# Altium PCB praline.PcbDoc (part 4 of 8)
Units mm, origin at the board's own origin, x right, y up, seen from the top; angles counter-clockwise.
Board outline 152.4 x 101.6 mm, 6 copper layers (In2.Cu, F.Cu, B.Cu, In1.Cu, In3.Cu, In4.Cu); 581 components, 490 nets, 2812 pads, 953 vias.
Unrouted connection lines stored in the file: 404.
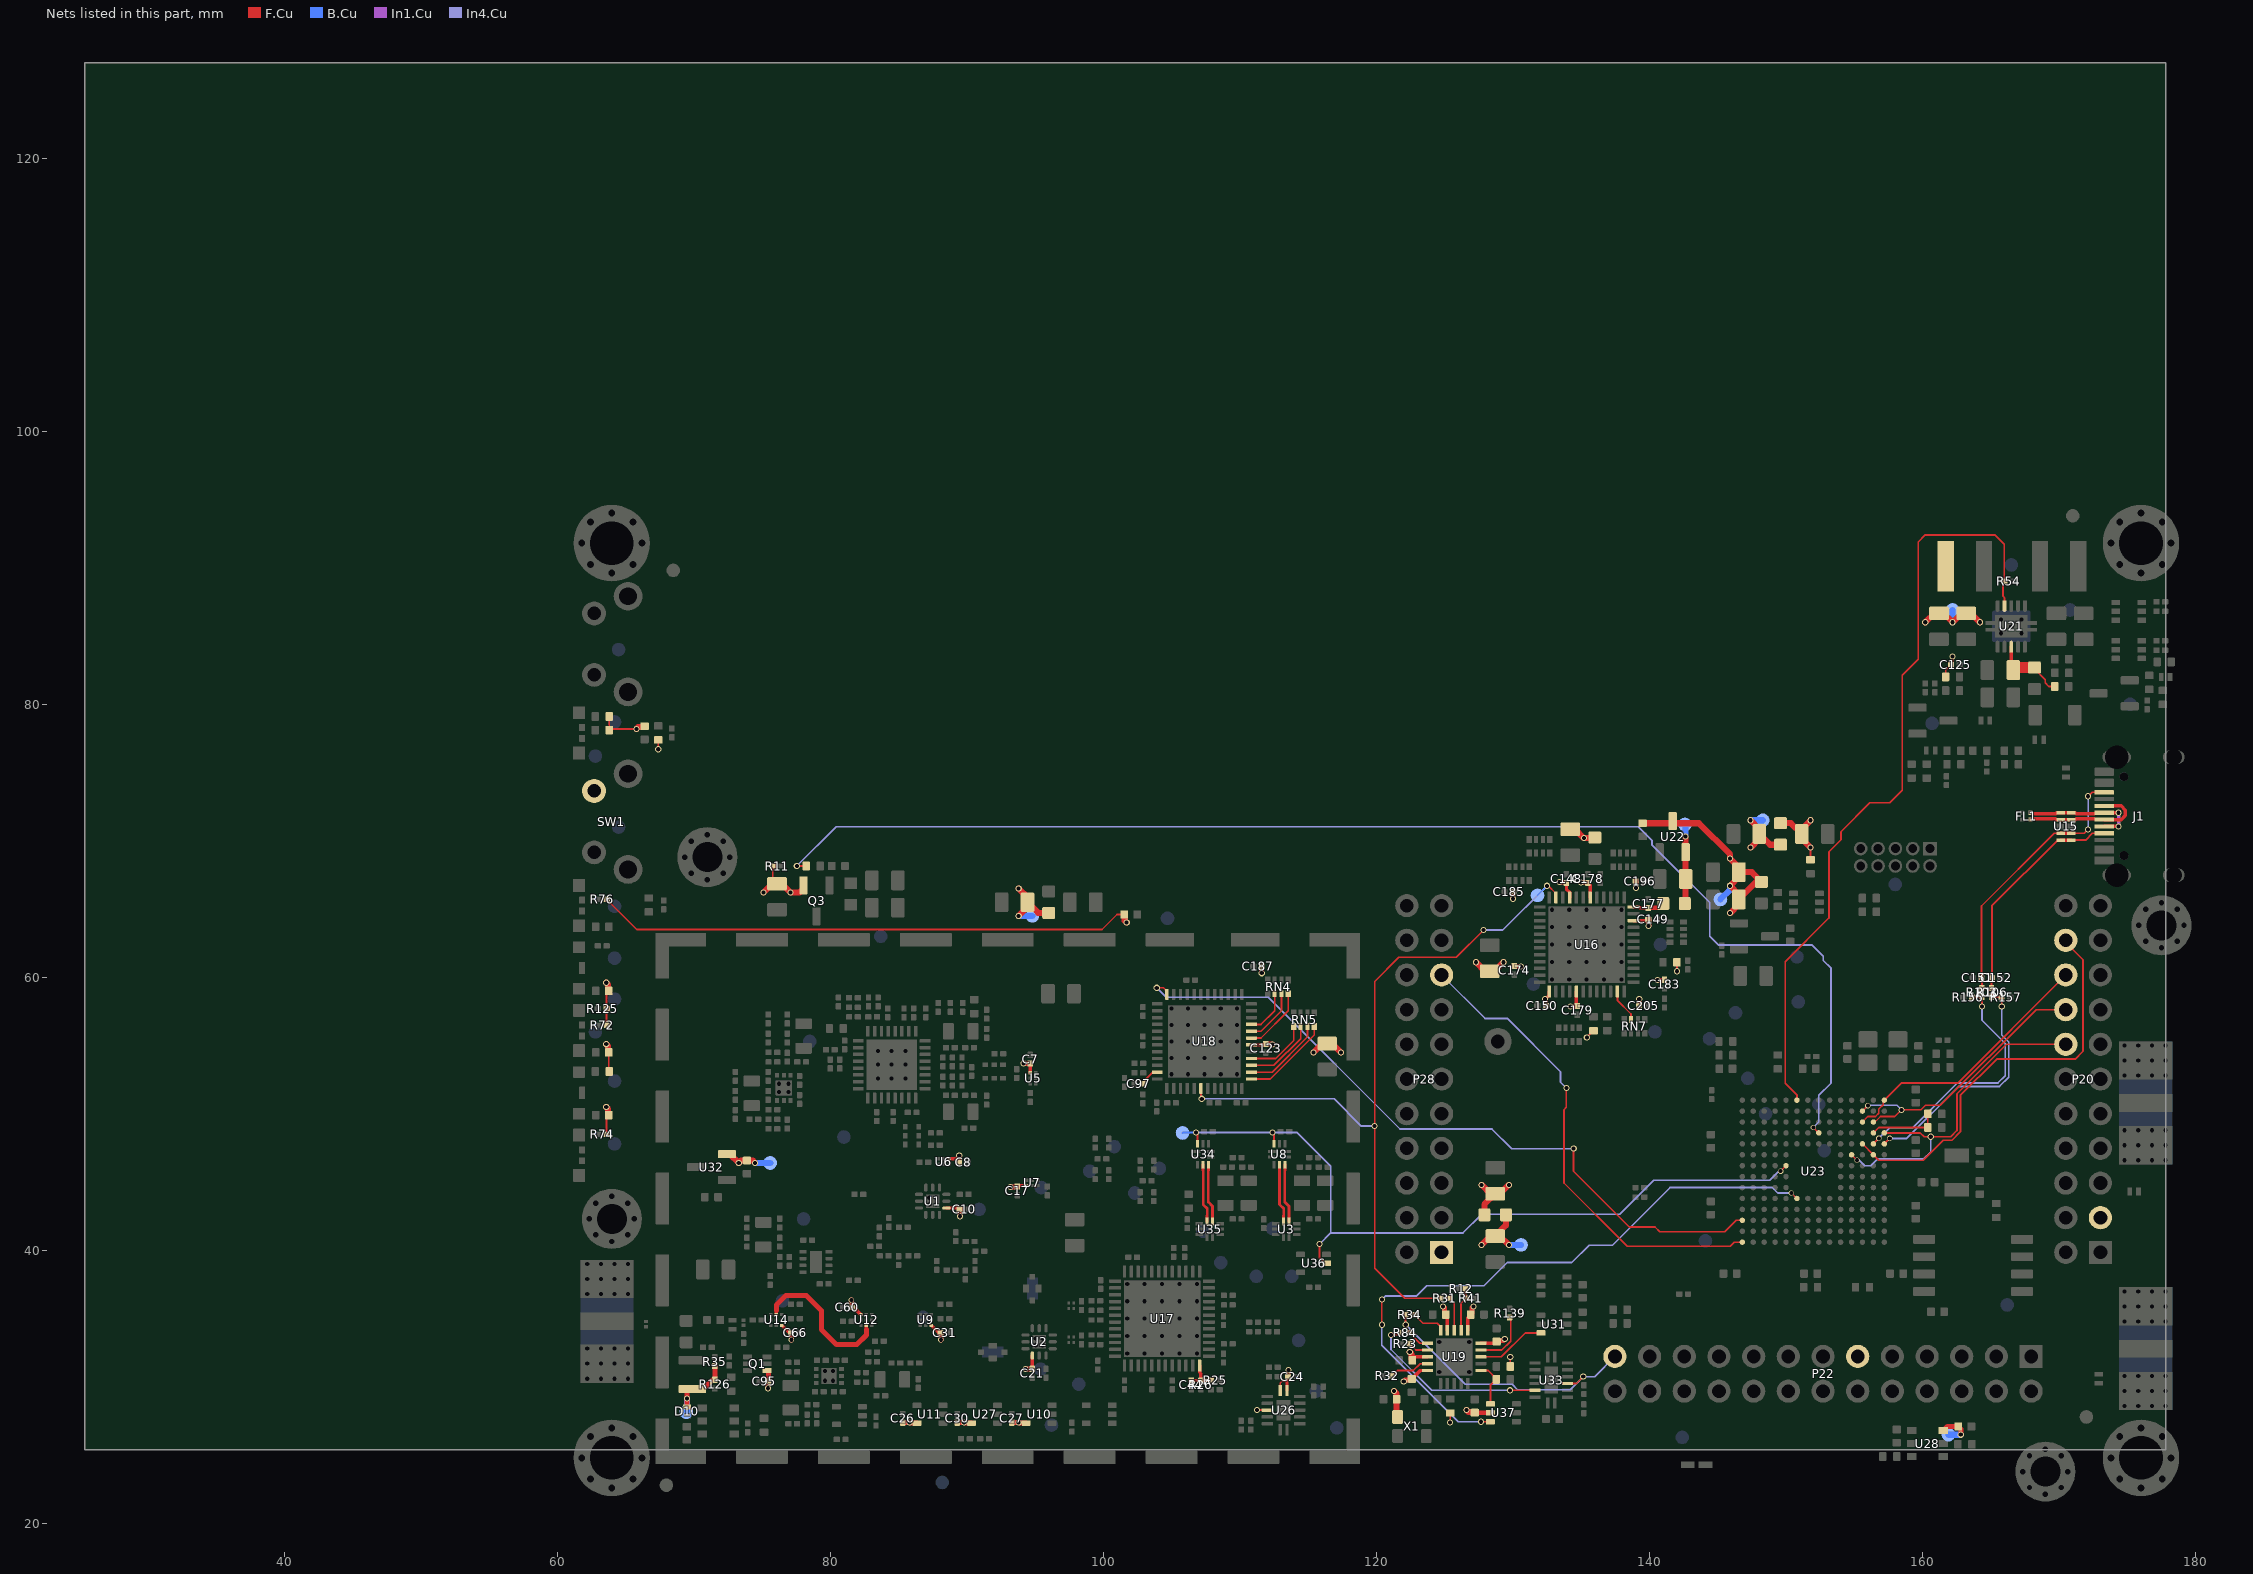
[diagram p7: the nets of this part, all layers, seen from the top]

## Part data (continued)
FB1 FB2 FB3 FB4 FB5 FB6 FB7 FB8: library part L_0603_1608Metric, "Inductor SMD 0603 (1608 Metric), square (rectangular) end terminal, IPC_7351 nominal, (Body size source: http://www.tortai-tech.com/upload/download/2011102023233369053.pdf), generated with kicad-footprint-generator", Manufacturer=TAI-TECH, Part Number=HCB1608KF-102T10, Datasheet=https://datasheet.lcsc.com/lcsc/2009171410_TAI-TECH-HCB1608KF-102T10_C304312.pdf, Description="1kΩ@100MHz 200mΩ ±25% 0603 Ferrite Bead", Substitution="Murata BLM18KG102SN1*", ki_fp_filters="Inductor_* L_* *Ferrite*"
FID1 FID2 FID3 FID4: library part Fiducial_1mm_Mask2mm, "Circular Fiducial, 1mm bare copper, 2mm soldermask opening (Level A)"
FL1: library part L_CommonModeChoke_Murata_DLM0NS, "Chip Common Mode Choke Coil, https://www.murata.com/en-global/products/productdata/8799424610334/EFLD0009.pdf", Manufacturer=Murata, Part Number=DLM0NSB280HY2D, Datasheet=https://www.murata.com/en-global/products/productdata/8799424610334/EFLD0009.pdf, Description="CMC 130MA 2LN 28 OHM SMD", ki_fp_filters="L_* L_CommonMode*"
FL2 FL3: library part Filter_Pulse_BPF1608LM09R5000A, "RF filter SMD 0603", Manufacturer="Pulse Electronics", Part Number=BPF1608LM02R2400A, Datasheet=https://productfinder.pulseelectronics.com/api/open/part-attachments/datasheet/BPF1608LM02R2400A, Description="RF FILTER BAND PASS 2.45GHZ 0603", ki_fp_filters=Filter*Mini?Circuits*FV1206*
H1 H2 H3 H4: library part MountingHole_3.2mm_M3_Pad_Via, "Mounting Hole 3.2mm, M3, generated by kicad-footprint-generator mountinghole.py", Datasheet=~, Description="Mounting Hole with connection", ki_fp_filters=MountingHole*Pad*
H5 H6 H7 H8: library part MountingHole_2.2mm_M2_Pad_Via, "Mounting Hole 2.2mm, M2, generated by kicad-footprint-generator mountinghole.py", Datasheet=~, Description="Mounting Hole with connection", ki_fp_filters=MountingHole*Pad*
J1: library part USB_C_Receptacle_HRO_TYPE-C-31-M-12, "USB Type-C receptacle for USB 2.0 and PD, http://www.krhro.com/uploads/soft/180320/1-1P320120243.pdf", Manufacturer=DEALON, Part Number=USB-TYPE-C-019, Datasheet=~, Description="CONN RCPT USB2.0 TYPE-C 16POS", Substitution="Yuandi TYPE-611A-T3", ki_fp_filters=USB*C*Receptacle*
J3: library part Laird_Technologies_BMI-S-230-F_50.8x38.1mm, "Laird Technologies BMI-S-230-F Shielding Cabinet Two Piece SMD 50.8x38.1mm", Manufacturer="TE Connectivity", Part Number=2118732-2, Datasheet=~, Description="BOARD SHIELD 2INX1.5IN FRAME", Note="use with shield 2118731-2"
JP1: library part SolderJumper-2_P1.3mm_Bridged_RoundedPad1.0x1.5mm, "SMD Solder Jumper, 1x1.5mm, rounded Pads, 0.3mm gap, bridged with 1 copper strip", Datasheet=~, Description="Solder Jumper, 2-pole, closed/bridged", ki_fp_filters=SolderJumper*Bridged*
L1: library part L_0201_0603Metric, "Inductor SMD 0201 (0603 Metric), square (rectangular) end terminal, IPC-7351 nominal, (Body size source: https://www.vishay.com/docs/20052/crcw0201e3.pdf), generated with kicad-footprint-generator", Datasheet=~, ki_fp_filters="Choke_* *Coil* Inductor_* L_*"
L2 L4 L5 L21 L22 L23 L24 L26 L27 L29 L33: library part L_TDK_MLZ2012_h1.25mm, "Inductor, TDK, MLZ2012_h1.25mm, 2.0x1.25x1.25mm (https://product.tdk.com/en/system/files/dam/doc/product/inductor/inductor/smd/catalog/inductor_commercial_decoupling_mlz2012_en.pdf)", Manufacturer=TDK, Part Number=MLZ2012N101LT000, Datasheet=~, Description="FIXED IND 100UH 140MA 3.5OHM SMD", Substitution=MLZ2012N101LTD25, ki_fp_filters="Choke_* *Coil* Inductor_* L_*"
L3 L12 L30 L31 L32: library part L_0201_0603Metric, "Inductor SMD 0201 (0603 Metric), square (rectangular) end terminal, IPC-7351 nominal, (Body size source: https://www.vishay.com/docs/20052/crcw0201e3.pdf), generated with kicad-footprint-generator", Manufacturer=Murata, Part Number=LQP03TN56NJ02D, Datasheet=~, Description="FIXED IND 56NH 100MA 3.9 OHM SMD", Substitution=LQP03TN56NH02D, ki_fp_filters="Choke_* *Coil* Inductor_* L_*"
L6: library part L_0201_0603Metric, "Inductor SMD 0201 (0603 Metric), square (rectangular) end terminal, IPC-7351 nominal, (Body size source: https://www.vishay.com/docs/20052/crcw0201e3.pdf), generated with kicad-footprint-generator", Manufacturer=Murata, Part Number=LQP03TN5N6H02D, Datasheet=~, Description="FIXED IND 5.6NH 350MA 400MOHM 0201", ki_fp_filters="Choke_* *Coil* Inductor_* L_*"
L7: library part L_0201_0603Metric, "Inductor SMD 0201 (0603 Metric), square (rectangular) end terminal, IPC_7351 nominal, (Body size source: https://www.vishay.com/docs/20052/crcw0201e3.pdf), generated with kicad-footprint-generator", Datasheet=~, ki_fp_filters="Choke_* *Coil* Inductor_* L_*"
L8 L15: library part L_0201_0603Metric, "Inductor SMD 0201 (0603 Metric), square (rectangular) end terminal, IPC_7351 nominal, (Body size source: https://www.vishay.com/docs/20052/crcw0201e3.pdf), generated with kicad-footprint-generator", Manufacturer=Murata, Part Number=LQP03TN4N7H02D, Tolerance=±3%, Datasheet=~, Description="FIXED IND 4.7NH 350MA 400MOHM 0201", ki_fp_filters="Choke_* *Coil* Inductor_* L_*"
L9: library part L_0201_0603Metric, "Inductor SMD 0201 (0603 Metric), square (rectangular) end terminal, IPC_7351 nominal, (Body size source: https://www.vishay.com/docs/20052/crcw0201e3.pdf), generated with kicad-footprint-generator", Manufacturer=Murata, Part Number=LQP03TN10NJ02D, Datasheet=~, Description="FIXED IND 10NH 250MA 700MOHM SMD", Substitution=LQP03TN10NH02D, ki_fp_filters="Choke_* *Coil* Inductor_* L_*"
L10 L11: library part L_Taiyo-Yuden_NR-40xx, "Inductor, Taiyo Yuden, NR series, Taiyo-Yuden_NR-40xx, 4.0mmx4.0mm", Manufacturer="Taiyo Yuden", Part Number=LSXND4040TKL4R7MDG, Datasheet=~, Description="FIXED IND 4.7UH 1.7A 84 MOHM SMD", Substitution="NRS4018T4R7MDGJ, LLXND4040TKL4R7MDG, NRS4018T4R7MDGJ", ki_fp_filters="Choke_* *Coil* Inductor_* L_*"
L13: library part L_0603_1608Metric, "Inductor SMD 0603 (1608 Metric), square (rectangular) end terminal, IPC_7351 nominal, (Body size source: http://www.tortai-tech.com/upload/download/2011102023233369053.pdf), generated with kicad-footprint-generator", Manufacturer="Taiyo Yuden", Part Number=LSQPB160807T2R2M, Datasheet=~, Description="FIXED IND 2.2UH 500MA 520MOHM SMD", Substitution="BRL1608T2R2M, LLQPB160807T2R2M", ki_fp_filters="Choke_* *Coil* Inductor_* L_*"
L14: library part L_0201_0603Metric, "Inductor SMD 0201 (0603 Metric), square (rectangular) end terminal, IPC_7351 nominal, (Body size source: https://www.vishay.com/docs/20052/crcw0201e3.pdf), generated with kicad-footprint-generator", Manufacturer=Murata, Part Number=LQP03TN5N6H02D, Tolerance=±3%, Datasheet=~, Description="FIXED IND 5.6NH 350MA 400MOHM 0201", ki_fp_filters="Choke_* *Coil* Inductor_* L_*"
L16 L17: library part L_0201_0603Metric, "Inductor SMD 0201 (0603 Metric), square (rectangular) end terminal, IPC_7351 nominal, (Body size source: https://www.vishay.com/docs/20052/crcw0201e3.pdf), generated with kicad-footprint-generator", Manufacturer=Murata, Part Number=LQP03HQ1N8W02D, Tolerance=±0.05, Datasheet=~, Description="FIXED IND 1.8NH 800MA 0201 0.05", ki_fp_filters="Choke_* *Coil* Inductor_* L_*"
L18: library part L_0201_0603Metric, "Inductor SMD 0201 (0603 Metric), square (rectangular) end terminal, IPC_7351 nominal, (Body size source: https://www.vishay.com/docs/20052/crcw0201e3.pdf), generated with kicad-footprint-generator", Manufacturer=Murata, Part Number=LQP03HQ1N6W02D, Tolerance=±0.05, Datasheet=~, Description="FIXED IND 1.6NH 1000MA 0201 0.05", ki_fp_filters="Choke_* *Coil* Inductor_* L_*"
L19: library part L_Taiyo-Yuden_A251818, "Inductor, Taiyo Yuden, Type A251818, 2.5mmx1.8mm (https://ds.yuden.co.jp/TYCOMPAS/ut/download?pn=LSQEA251818T470M&fileType=ED)", Manufacturer="Taiyo Yuden", Part Number=LSQEA251818T470M, Datasheet=~, Description="FIXED IND 47UH 120MA 0.84OHM SMD", Substitution="LSQEA251818T470K, LBR2518T470M, LBR2518T470K", ki_fp_filters="Choke_* *Coil* Inductor_* L_*"
L28: library part L_0201_0603Metric, "Inductor SMD 0201 (0603 Metric), square (rectangular) end terminal, IPC-7351 nominal, (Body size source: https://www.vishay.com/docs/20052/crcw0201e3.pdf), generated with kicad-footprint-generator", Manufacturer=Murata, Part Number=LQP03TN18NJ02D, Datasheet=~, Description="FIXED IND 18NH 200MA 800MOHM SMD", Substitution=LQP03TN56NH02D, ki_fp_filters="Choke_* *Coil* Inductor_* L_*"
L34: library part L_0201_0603Metric, "Inductor SMD 0201 (0603 Metric), square (rectangular) end terminal, IPC-7351 nominal, (Body size source: https://www.vishay.com/docs/20052/crcw0201e3.pdf), generated with kicad-footprint-generator", Manufacturer=Murata, Part Number=LQP03TN33NJ02D, Datasheet=~, Description="FIXED IND 33NH 120MA 2.95OHM SMD", Substitution=LQP03TN56NH02D, ki_fp_filters="Choke_* *Coil* Inductor_* L_*"
P1 P2 P3: library part SMA_MyAntenna_A-SMA-KE-16.5A_EdgeMount, Manufacturer=MyAntenna, Part Number=A-SMA-KE-16.5A, Datasheet=~, Description="CONN SMA RCPT STR 50OHM EDGE MNT", Substitution=M04-0102170R0A
P20 P28: library part PinSocket_2x11_P2.54mm_Vertical_Flipped, "Through hole straight socket strip, 2x11, 2.54mm pitch, double cols (from Kicad 4.0.7), script generated", Manufacturer=Sullins, Part Number=PPPC112LFBN-RC, Datasheet=~, Description="CONN HEADER FMAL 22PS.1\" DL GOLD", ki_fp_filters=Connector*:*_2x??_*
P22: library part PinSocket_2x13_P2.54mm_Vertical_Flipped, "Through hole straight socket strip, 2x13, 2.54mm pitch, double cols (from Kicad 4.0.7), script generated", Manufacturer=Sullins, Part Number=PPPC132LFBN-RC, Datasheet=~, Description="CONN HEADER FMAL 26PS.1\" DL GOLD", ki_fp_filters=Connector*:*_2x??_*
P26: library part PinHeader_2x05_P1.27mm_Vertical, "Through hole straight pin header, 2x05, 1.27mm pitch, double rows", Manufacturer=Sullins, Part Number=GRPB052VWVN-RC, Datasheet=~, Description="CONN HEADER .050\" 10PS DL PCB AU", ki_fp_filters=Connector*:*_2x??_*
Q1: library part SOT-563, "SOT, 6 Pin (https://www.jedec.org/system/files/docs/MO-293B.pdf), generated with kicad-footprint-generator ipc_gullwing_generator.py", Manufacturer="Diodes Inc.", Part Number=DMC2400UV-7, Datasheet=~, Description="Dual NMOS/PMOS transistor, 6 pin package", Substitution=DMC2400UV*, ki_fp_filters="TSOP* SC?70* SC?88* SOT?363*"
Q3 Q4 Q5 Q6: library part SOT-23-3, "SOT, 3 Pin (JEDEC MO-178 inferred 3-pin variant https://www.jedec.org/document_search?search_api_views_fulltext=MO-178), generated with kicad-footprint-generator ipc_gullwing_generator.py", Manufacturer="Yangzhou Yangjie", Part Number=YJL3401A, Datasheet=https://www.21yangjie.com/pdf/mosfet/YJL3401A.pdf, Description="P-CH MOSFET 30V 4.4A SOT-23-3L", Substitution="Alpha & Omega AO3401A"
Q7 Q10: library part SOT-363_SC-70-6, "SOT-363, SC-70-6, SC-88", Manufacturer="Yangzhou Yangjie", Part Number=BC847BS, Datasheet=https://www.21yangjie.com/pdf/xxh/xxhsjg/BC847BS.pdf, Description="SOT-363 NPN+NPN 0.3W 0.1A 50V", ki_fp_filters=SOT?363*
Q9: library part SOT-363_SC-70-6, "SOT-363, SC-70-6, SC-88", Manufacturer="Yangzhou Yangjie", Part Number=BC857BS, Datasheet=https://www.21yangjie.com/pdf/xxh/xxhsjg/BC857BS.pdf, Description="PNP+PNP TRANS 45V 0.2A SOT-363"
R1 R2 R72: library part R_0201_0603Metric, "Resistor SMD 0201 (0603 Metric), square (rectangular) end terminal, IPC_7351 nominal, (Body size source: https://www.vishay.com/docs/20052/crcw0201e3.pdf), generated with kicad-footprint-generator", Manufacturer=Yageo, Part Number=RC0201JR-07470RL, Datasheet=~, Description="RES 470 OHM 5% 1/20W 0201", Substitution="any equivalent", ki_fp_filters=R_*
R3 R11 R61: library part R_0201_0603Metric, "Resistor SMD 0201 (0603 Metric), square (rectangular) end terminal, IPC_7351 nominal, (Body size source: https://www.vishay.com/docs/20052/crcw0201e3.pdf), generated with kicad-footprint-generator", Manufacturer=Yageo, Part Number=RC0201FR-0722K6L, Datasheet=~, Description="RES 22.6K OHM 1% 1/20W 0201", Substitution="any equivalent", ki_fp_filters=R_*
R4: library part R_0201_0603Metric, "Resistor SMD 0201 (0603 Metric), square (rectangular) end terminal, IPC_7351 nominal, (Body size source: https://www.vishay.com/docs/20052/crcw0201e3.pdf), generated with kicad-footprint-generator", Manufacturer=Yageo, Part Number=RC0201FR-0751KL, Tolerance=±1%, Datasheet=~, Description="RES 51K OHM 1% 1/20W 0201", Substitution="any equivalent", ki_fp_filters=R_*
R5 R7 R36 R37 R40 R44 R48 R49 R52 R59 R62 R63 R64 R66 R67 R68 R75 R85 R93 R100 R104 R105 R120: library part R_0402_1005Metric, "Resistor SMD 0402 (1005 Metric), square (rectangular) end terminal, IPC_7351 nominal, (Body size source: IPC-SM-782 page 72, https://www.pcb-3d.com/wordpress/wp-content/uploads/ipc-sm-782a_amendment_1_and_2.pdf), generated with kicad-footprint-generator", Manufacturer=Yageo, Part Number=RC0402JR-0710KL, Datasheet=~, Description="RES 10K OHM 1/16W 5% 0402 SMD", Substitution="any equivalent", ki_fp_filters=R_*
R6 R21 R127 R140 R141 R143 R145 R148: library part R_0201_0603Metric, "Resistor SMD 0201 (0603 Metric), square (rectangular) end terminal, IPC-7351 nominal, (Body size source: https://www.vishay.com/docs/20052/crcw0201e3.pdf), generated with kicad-footprint-generator", Manufacturer=Yageo, Part Number=RC0201JR-07100RL, Datasheet=~, Description="RES 100 OHM 5% 1/20W 0201", Substitution="any equivalent", ki_fp_filters=R_*
R8 R9 R10 R13: library part R_0201_0603Metric, "Resistor SMD 0201 (0603 Metric), square (rectangular) end terminal, IPC_7351 nominal, (Body size source: https://www.vishay.com/docs/20052/crcw0201e3.pdf), generated with kicad-footprint-generator", Manufacturer=Yageo, Part Number=RC0201JR-070RL, Datasheet=~, Description="RES 0 OHM JUMPER 1/20W 0201", Substitution="any equivalent", ki_fp_filters=R_*
R12 R19 R23 R30 R31 R32 R34 R41 R84 R108 R139 R142: library part R_0201_0603Metric, "Resistor SMD 0201 (0603 Metric), square (rectangular) end terminal, IPC-7351 nominal, (Body size source: https://www.vishay.com/docs/20052/crcw0201e3.pdf), generated with kicad-footprint-generator", Manufacturer=Yageo, Part Number=RC0201JR-0733RL, Datasheet=~, Description="RES 33 OHM 5% 1/20W 0201", Substitution="any equivalent", ki_fp_filters=R_*
R14 R15 R16 R17 R118 R119: library part R_0201_0603Metric, "Resistor SMD 0201 (0603 Metric), square (rectangular) end terminal, IPC_7351 nominal, (Body size source: https://www.vishay.com/docs/20052/crcw0201e3.pdf), generated with kicad-footprint-generator", Datasheet=~, ki_fp_filters=R_*
R18: library part R_0201_0603Metric, "Resistor SMD 0201 (0603 Metric), square (rectangular) end terminal, IPC-7351 nominal, (Body size source: https://www.vishay.com/docs/20052/crcw0201e3.pdf), generated with kicad-footprint-generator", Manufacturer=Yageo, Part Number=RC0201FR-0722K6L, Datasheet=~, Description="RES 22.6K OHM 1% 1/20W 0201", Substitution="any equivalent", ki_fp_filters=R_*
R20 R38 R46 R47 R55: library part R_0402_1005Metric, "Resistor SMD 0402 (1005 Metric), square (rectangular) end terminal, IPC_7351 nominal, (Body size source: IPC-SM-782 page 72, https://www.pcb-3d.com/wordpress/wp-content/uploads/ipc-sm-782a_amendment_1_and_2.pdf), generated with kicad-footprint-generator", Manufacturer=Yageo, Part Number=RC0402FR-07180KL, Tolerance=±1%, Datasheet=~, Description="RES 180K OHM 1% 1/16W 0402", Substitution="any equivalent", ki_fp_filters=R_*
R22 R57 R86 R87: library part R_0201_0603Metric, "Resistor SMD 0201 (0603 Metric), square (rectangular) end terminal, IPC-7351 nominal, (Body size source: https://www.vishay.com/docs/20052/crcw0201e3.pdf), generated with kicad-footprint-generator", Manufacturer=Yageo, Part Number=RC0201JR-0733KL, Datasheet=~, Description="RES 33K OHM 5% 1/20W 0201", Substitution="any equivalent", ki_fp_filters=R_*
R24 R94 R96 R98: library part R_0201_0603Metric, "Resistor SMD 0201 (0603 Metric), square (rectangular) end terminal, IPC_7351 nominal, (Body size source: https://www.vishay.com/docs/20052/crcw0201e3.pdf), generated with kicad-footprint-generator", Manufacturer=Yageo, Part Number=RC0201FR-071KL, Datasheet=~, Description="RES 1K OHM 1% 1/20W 0201", Substitution="any equivalent", ki_fp_filters=R_*
R25: library part R_0201_0603Metric, "Resistor SMD 0201 (0603 Metric), square (rectangular) end terminal, IPC_7351 nominal, (Body size source: https://www.vishay.com/docs/20052/crcw0201e3.pdf), generated with kicad-footprint-generator", Manufacturer=Yageo, Part Number=RC0201JR-07750RL, Datasheet=~, Description="RES 750 OHM 5% 1/20W 0201", Substitution="any equivalent", ki_fp_filters=R_*
R26: library part R_0201_0603Metric, "Resistor SMD 0201 (0603 Metric), square (rectangular) end terminal, IPC_7351 nominal, (Body size source: https://www.vishay.com/docs/20052/crcw0201e3.pdf), generated with kicad-footprint-generator", Manufacturer=Yageo, Part Number=RC0201JR-071K2L, Datasheet=~, Description="RES 1.2K OHM 5% 1/20W 0201", Substitution="any equivalent", ki_fp_filters=R_*
R27 R28 R45 R53: library part R_0402_1005Metric, "Resistor SMD 0402 (1005 Metric), square (rectangular) end terminal, IPC_7351 nominal, (Body size source: IPC-SM-782 page 72, https://www.pcb-3d.com/wordpress/wp-content/uploads/ipc-sm-782a_amendment_1_and_2.pdf), generated with kicad-footprint-generator", Manufacturer=Yageo, Part Number=RC0402JR-071K8L, Datasheet=~, Description="RES 1.8K OHM 5% 1/16W 0402", Substitution="any equivalent", ki_fp_filters=R_*
R29: library part R_0201_0603Metric, "Resistor SMD 0201 (0603 Metric), square (rectangular) end terminal, IPC_7351 nominal, (Body size source: https://www.vishay.com/docs/20052/crcw0201e3.pdf), generated with kicad-footprint-generator", Manufacturer=Yageo, Part Number=RC0201JR-07100RL, Datasheet=~, Description="RES 100 OHM 5% 1/20W 0201", Substitution="any equivalent", ki_fp_filters=R_*
R33 R123 R155: library part R_0201_0603Metric, "Resistor SMD 0201 (0603 Metric), square (rectangular) end terminal, IPC-7351 nominal, (Body size source: https://www.vishay.com/docs/20052/crcw0201e3.pdf), generated with kicad-footprint-generator", Manufacturer=Yageo, Part Number=RC0201JR-0710RL, Datasheet=~, Description="RES 10 OHM 5% 1/20W 0201", Substitution="any equivalent", ki_fp_filters=R_*
R35 R114 R129 R133 R138 R144 R151 R153 R154: library part R_0201_0603Metric, "Resistor SMD 0201 (0603 Metric), square (rectangular) end terminal, IPC-7351 nominal, (Body size source: https://www.vishay.com/docs/20052/crcw0201e3.pdf), generated with kicad-footprint-generator", Manufacturer=Yageo, Part Number=RC0201FR-071KL, Datasheet=~, Description="RES 1K OHM 1% 1/20W 0201", Substitution="any equivalent", ki_fp_filters=R_*
R39: library part R_0402_1005Metric, "Resistor SMD 0402 (1005 Metric), square (rectangular) end terminal, IPC_7351 nominal, (Body size source: IPC-SM-782 page 72, https://www.pcb-3d.com/wordpress/wp-content/uploads/ipc-sm-782a_amendment_1_and_2.pdf), generated with kicad-footprint-generator", Manufacturer=Yageo, Part Number=RC0402FR-0737K4L, Tolerance=±1%, Datasheet=~, Description="RES 37.4K OHM 1% 1/16W 0402", Substitution="any equivalent", ki_fp_filters=R_*
R42: library part R_0201_0603Metric, "Resistor SMD 0201 (0603 Metric), square (rectangular) end terminal, IPC_7351 nominal, (Body size source: https://www.vishay.com/docs/20052/crcw0201e3.pdf), generated with kicad-footprint-generator", Manufacturer=Yageo, Part Number=RC0201JR-07220RL, Datasheet=~, Description="RES 220 OHM 5% 1/20W 0201", Substitution="any equivalent", ki_fp_filters=R_*
R43 R124 R128 R130 R131 R136 R146 R147: library part R_0201_0603Metric, "Resistor SMD 0201 (0603 Metric), square (rectangular) end terminal, IPC-7351 nominal, (Body size source: https://www.vishay.com/docs/20052/crcw0201e3.pdf), generated with kicad-footprint-generator", Manufacturer=Yageo, Part Number=RC0201JR-07220RL, Datasheet=~, Description="RES 220 OHM 5% 1/20W 0201", Substitution="any equivalent", ki_fp_filters=R_*
R50: library part R_0402_1005Metric, "Resistor SMD 0402 (1005 Metric), square (rectangular) end terminal, IPC_7351 nominal, (Body size source: IPC-SM-782 page 72, https://www.pcb-3d.com/wordpress/wp-content/uploads/ipc-sm-782a_amendment_1_and_2.pdf), generated with kicad-footprint-generator", Manufacturer=Yageo, Part Number=RC0402JR-0710KL, Tolerance=10k, Datasheet=~, Description="RES 10K OHM 1/16W 5% 0402 SMD", Substitution="any equivalent", ki_fp_filters=R_*
R51 R54 R74 R76 R103 R106 R107 R126: library part R_0201_0603Metric, "Resistor SMD 0201 (0603 Metric), square (rectangular) end terminal, IPC-7351 nominal, (Body size source: https://www.vishay.com/docs/20052/crcw0201e3.pdf), generated with kicad-footprint-generator", Manufacturer=Yageo, Part Number=RC0201FR-074K7L, Datasheet=~, Description="RES 4.7K OHM 1% 1/20W 0201", Substitution="any equivalent", ki_fp_filters=R_*
R56: library part R_0402_1005Metric, "Resistor SMD 0402 (1005 Metric), square (rectangular) end terminal, IPC_7351 nominal, (Body size source: IPC-SM-782 page 72, https://www.pcb-3d.com/wordpress/wp-content/uploads/ipc-sm-782a_amendment_1_and_2.pdf), generated with kicad-footprint-generator", Manufacturer=Yageo, Part Number=RC0402FR-07820KL, Tolerance=±1%, Datasheet=~, Description="RES 820K OHM 1% 1/16W 0402", Substitution="any equivalent", ki_fp_filters=R_*
R58 R70: library part R_0402_1005Metric, "Resistor SMD 0402 (1005 Metric), square (rectangular) end terminal, IPC_7351 nominal, (Body size source: IPC-SM-782 page 72, https://www.pcb-3d.com/wordpress/wp-content/uploads/ipc-sm-782a_amendment_1_and_2.pdf), generated with kicad-footprint-generator", Part Number=RC0402FR-07820KL, Manufacturer=Yageo, Datasheet=~, Description="RES 820K OHM 1% 1/16W 0402", Substitution="any equivalent", ki_fp_filters=R_*
R60 R71 R79 R80: library part R_0402_1005Metric, "Resistor SMD 0402 (1005 Metric), square (rectangular) end terminal, IPC_7351 nominal, (Body size source: IPC-SM-782 page 72, https://www.pcb-3d.com/wordpress/wp-content/uploads/ipc-sm-782a_amendment_1_and_2.pdf), generated with kicad-footprint-generator", Part Number=RC0402JR-075K1L, Manufacturer=Yageo, Datasheet=~, Description="RES 5.1K OHM 5% 1/16W 0402", Substitution="any equivalent", ki_fp_filters=R_*
R65 R82: library part R_0402_1005Metric, "Resistor SMD 0402 (1005 Metric), square (rectangular) end terminal, IPC_7351 nominal, (Body size source: IPC-SM-782 page 72, https://www.pcb-3d.com/wordpress/wp-content/uploads/ipc-sm-782a_amendment_1_and_2.pdf), generated with kicad-footprint-generator", Manufacturer=Yageo, Part Number=RC0402JR-0718KL, Datasheet=~, Description="RES SMD 18K OHM 5% 1/16W 0402", Substitution="any equivalent", ki_fp_filters=R_*
R69 R121: library part R_0201_0603Metric, "Resistor SMD 0201 (0603 Metric), square (rectangular) end terminal, IPC_7351 nominal, (Body size source: https://www.vishay.com/docs/20052/crcw0201e3.pdf), generated with kicad-footprint-generator", Manufacturer=Yageo, Part Number=RC0201FR-0712KL, Tolerance=±1%, Datasheet=~, Description="RES 12K OHM 1% 1/20W 0201", Substitution="any equivalent", ki_fp_filters=R_*
R73: library part R_0402_1005Metric, "Resistor SMD 0402 (1005 Metric), square (rectangular) end terminal, IPC_7351 nominal, (Body size source: IPC-SM-782 page 72, https://www.pcb-3d.com/wordpress/wp-content/uploads/ipc-sm-782a_amendment_1_and_2.pdf), generated with kicad-footprint-generator", Manufacturer=Yageo, Part Number=RC0402JR-073KL, Datasheet=~, Description="RES 3K OHM 5% 1/16W 0402", Substitution="any equivalent", ki_fp_filters=R_*
R77 R78: library part R_0201_0603Metric, "Resistor SMD 0201 (0603 Metric), square (rectangular) end terminal, IPC-7351 nominal, (Body size source: https://www.vishay.com/docs/20052/crcw0201e3.pdf), generated with kicad-footprint-generator", Part Number=RC0201JR-072K2L, Manufacturer=Yageo, Datasheet=~, Description="RES 2.2K OHM 5% 1/20W 0201", Substitution="any equivalent", ki_fp_filters=R_*
R81 R83: library part R_0201_0603Metric, "Resistor SMD 0201 (0603 Metric), square (rectangular) end terminal, IPC-7351 nominal, (Body size source: https://www.vishay.com/docs/20052/crcw0201e3.pdf), generated with kicad-footprint-generator", Part Number=RC0201JR-0733KL, Manufacturer=Yageo, Datasheet=~, Description="RES 33K OHM 5% 1/20W 0201", Substitution="any equivalent", ki_fp_filters=R_*
R88 R89 R90 R91: library part R_0402_1005Metric, "Resistor SMD 0402 (1005 Metric), square (rectangular) end terminal, IPC_7351 nominal, (Body size source: IPC-SM-782 page 72, https://www.pcb-3d.com/wordpress/wp-content/uploads/ipc-sm-782a_amendment_1_and_2.pdf), generated with kicad-footprint-generator", Manufacturer=Yageo, Part Number=RC0402FR-0718K7L, Tolerance=±1%, Datasheet=~, Description="RES 18.7K OHM 1% 1/16W 0402", Substitution="any equivalent", ki_fp_filters=R_*
R92 R95 R97 R99 R109: library part R_0201_0603Metric, "Resistor SMD 0201 (0603 Metric), square (rectangular) end terminal, IPC_7351 nominal, (Body size source: https://www.vishay.com/docs/20052/crcw0201e3.pdf), generated with kicad-footprint-generator", Manufacturer=Yageo, Part Number=RC0201FR-074K7L, Datasheet=~, Description="RES 4.7K OHM 1% 1/20W 0201", Substitution="any equivalent", ki_fp_filters=R_*
R101: library part R_0402_1005Metric, "Resistor SMD 0402 (1005 Metric), square (rectangular) end terminal, IPC_7351 nominal, (Body size source: IPC-SM-782 page 72, https://www.pcb-3d.com/wordpress/wp-content/uploads/ipc-sm-782a_amendment_1_and_2.pdf), generated with kicad-footprint-generator", Manufacturer=Yageo, Part Number=RC0402FR-07100KL, Tolerance=±1%, Datasheet=~, Description="RES 100K OHM 1% 1/16W 0402", Substitution="any equivalent", ki_fp_filters=R_*
R102 R112 R156 R157: library part R_0201_0603Metric, "Resistor SMD 0201 (0603 Metric), square (rectangular) end terminal, IPC-7351 nominal, (Body size source: https://www.vishay.com/docs/20052/crcw0201e3.pdf), generated with kicad-footprint-generator", Manufacturer=Yageo, Part Number=RC0201JR-07330RL, Datasheet=~, Description="RES 330 OHM 5% 1/20W 0201", Substitution="any equivalent", ki_fp_filters=R_*
R110 R111: library part R_0201_0603Metric, "Resistor SMD 0201 (0603 Metric), square (rectangular) end terminal, IPC_7351 nominal, (Body size source: https://www.vishay.com/docs/20052/crcw0201e3.pdf), generated with kicad-footprint-generator", Manufacturer=Yageo, Part Number=RC0201JR-07330RL, Datasheet=~, Description="RES 330 OHM 5% 1/20W 0201", Substitution="any equivalent", ki_fp_filters=R_*
R113: library part R_0402_1005Metric, "Resistor SMD 0402 (1005 Metric), square (rectangular) end terminal, IPC-7351 nominal, (Body size source: IPC-SM-782 page 72, https://www.pcb-3d.com/wordpress/wp-content/uploads/ipc-sm-782a_amendment_1_and_2.pdf), generated with kicad-footprint-generator", Manufacturer=Yageo, Part Number=RC0402JR-0710KL, Datasheet=~, Description="RES 10K OHM 1/16W 5% 0402 SMD", Substitution="any equivalent", ki_fp_filters=R_*
R115 R116 R117 R132 R137: library part R_0201_0603Metric, "Resistor SMD 0201 (0603 Metric), square (rectangular) end terminal, IPC-7351 nominal, (Body size source: https://www.vishay.com/docs/20052/crcw0201e3.pdf), generated with kicad-footprint-generator", Manufacturer=Yageo, Part Number=RC0201JR-07470RL, Datasheet=~, Description="RES 470 OHM 5% 1/20W 0201", Substitution="any equivalent", ki_fp_filters=R_*
R122: library part R_0201_0603Metric, "Resistor SMD 0201 (0603 Metric), square (rectangular) end terminal, IPC_7351 nominal, (Body size source: https://www.vishay.com/docs/20052/crcw0201e3.pdf), generated with kicad-footprint-generator", Manufacturer=Yageo, Part Number=RC0201FR-074K7L, Tolerance=±1%, Datasheet=~, Description="RES 4.7K OHM 1% 1/20W 0201", Substitution="any equivalent", ki_fp_filters=R_*
R125: library part R_0201_0603Metric, "Resistor SMD 0201 (0603 Metric), square (rectangular) end terminal, IPC_7351 nominal, (Body size source: https://www.vishay.com/docs/20052/crcw0201e3.pdf), generated with kicad-footprint-generator", Manufacturer=Yageo, Part Number=RC0201FR-0712KL, Datasheet=~, Description="RES 12K OHM 1% 1/20W 0201", Substitution="any equivalent", ki_fp_filters=R_*
R134: library part R_0201_0603Metric, "Resistor SMD 0201 (0603 Metric), square (rectangular) end terminal, IPC-7351 nominal, (Body size source: https://www.vishay.com/docs/20052/crcw0201e3.pdf), generated with kicad-footprint-generator", Manufacturer=Yageo, Part Number=RC0201JR-07180RL, Datasheet=~, Description="RES 180 OHM 5% 1/20W 0201", Substitution="any equivalent", ki_fp_filters=R_*
R135: library part R_0201_0603Metric, "Resistor SMD 0201 (0603 Metric), square (rectangular) end terminal, IPC-7351 nominal, (Body size source: https://www.vishay.com/docs/20052/crcw0201e3.pdf), generated with kicad-footprint-generator", Part Number=RC0201FR-0712KL, Manufacturer=Yageo, Datasheet=~, Description="RES 12K OHM 1% 1/20W 0201", Substitution="any equivalent", ki_fp_filters=R_*
R149 R150: library part R_0201_0603Metric, "Resistor SMD 0201 (0603 Metric), square (rectangular) end terminal, IPC-7351 nominal, (Body size source: https://www.vishay.com/docs/20052/crcw0201e3.pdf), generated with kicad-footprint-generator", Manufacturer=Yageo, Part Number=RC0201JR-070RL, Datasheet=~, Description="RES 0 OHM JUMPER 1/20W 0201", Substitution="any equivalent", ki_fp_filters=R_*
R152: library part R_0201_0603Metric, "Resistor SMD 0201 (0603 Metric), square (rectangular) end terminal, IPC-7351 nominal, (Body size source: https://www.vishay.com/docs/20052/crcw0201e3.pdf), generated with kicad-footprint-generator", Manufacturer=Yageo, Part Number=RC0201JR-073RL, Datasheet=~, Description="RES 3 OHM 5% 1/20W 0201", Substitution="any equivalent", ki_fp_filters=R_*
RN1 RN2 RN3 RN4 RN5 RN6 RN7 RN8: library part R_Array_Convex_4x0402, "Chip Resistor Network, ROHM MNR04 (see mnr_g.pdf)", Manufacturer=Yageo, Part Number=YC124-JR-07100RL, Datasheet=~, Description="RES ARRAY 4 RES 100 OHM 0804", Substitution="any equivalent", ki_fp_filters="DIP* SOIC* R*Array*Concave* R*Array*Convex* MSOP*"
SW1 SW2: library part SW_Tactile_SPST_Angled_PTS645Vx58-2LFS, "tactile switch SPST right angle, PTS645VL58-2 LFS", Manufacturer="TE Connectivity", Part Number=FSMRA3JH, Datasheet=~, Description="SWITCH TACTILE SPST-NO 0.05A 24V"
T1 T2: library part Anaren_0805_2012Metric-6, "https://cdn.anaren.com/product-documents/Xinger/DirectionalCouplers/DC4759J5020AHF/DC4759J5020AHF_DataSheet(Rev_E).pdf", Manufacturer=TTM, Part Number=B0310J50100AHF, Datasheet=~, Description="Ultra Low Profile 0805 Balun 50 to 100 ohm Balanced"
T3 T4: library part Balun_TDK_TFSZ06052460-3310A2X, "Thin-film balun for 2300-2690 MHz", Manufacturer=TDK, Part Number=TFSZ06052460-3310A2X, Datasheet=https://product.tdk.com/en/system/files/dam/doc/product/rf/rf/balun/catalog/rf_balun_tfsz06052460-3310a2x_en.pdf, Description="Thin-Film Balun for 2300-2690MHz", ki_fp_filters=Balun*Johanson*0896BM15A0001*
TP1 TP2 TP3 TP4 TP5 TP7 TP8 TP9 TP10 TP11 TP12 TP13 TP14 TP15 TP16 TP17 TP18 TP19 TP20 TP21 TP22 TP23 TP24 TP25 TP26 TP27 TP28 TP29 TP30 TP31 TP32 TP33 TP34 TP35 TP36 TP37 TP38 TP39 TP40 TP41 TP42 TP43 TP44 TP45 TP46 TP47 TP48 TP49 TP50 TP51 TP52 TP53 TP54 TP55 TP56 TP57 TP58 TP59 TP60 TP61 TP62 TP63 TP64 TP65 TP66: library part TestPoint_Pad_D1.0mm, "SMD pad as test Point, diameter 1.0mm", Datasheet=~, ki_fp_filters="Pin* Test*"
  TP5: Description="test point"
TP6: library part TestPoint_Loop_D1.80mm_Drill1.0mm_Beaded, "wire loop with bead as test point, loop diameter 1.8mm, hole diameter 1.0mm", Manufacturer=Ronghe, Part Number=RH-5001, Datasheet=~, Description="PC TEST POINT MINIATURE BLACK", ki_fp_filters="Pin* Test*"
U1 U2: library part QFN-12-1EP_2x2mm_P0.5mm_EP1x1mm, "QFN, 12 Pin", Manufacturer=Maxscend, Part Number=MXD8546F, Datasheet=https://www.lcsc.com/datasheet/lcsc_datasheet_1912111437_Maxscend-MXD8546FA_C462321.pdf, Description="X-DPDT RF SWITCH"
U3 U8 U34 U35: library part GTIC_UQFN-10_1.4x1.8mm_P0.4mm, "UQFN, 10 Pin https://www.gtic.com/static/upload/file/20241013/1728795516451920.pdf", Manufacturer=GTIC, Part Number=GT4227QA, Datasheet=https://www.gtic.com/static/upload/file/20241013/1728795516451920.pdf, Description="USB 2.0 Switch with ESD Protection, UQFN-10 Pitch 0.4 mm", ki_fp_filters="UQFN*1.3x1.8mm?P0.4mm* UQFN*1.6x2.1mm?P0.5mm*"
U4: library part QFN-32-1EP_5x5mm_P0.5mm_EP3.7x3.7mm_ThermalVias, "QFN, 32 Pin (https://www.espressif.com/sites/default/files/documentation/0a-esp8285_datasheet_en.pdf), generated with kicad-footprint-generator ipc_noLead_generator.py", Manufacturer=RFMD, Part Number=RFFC5072TR7, Datasheet=https://www.qorvo.com/products/d/da000735, Description="WIDEBAND SYNTHESIZER/VCO WITH INTEGRATED 6GHz MIXER", Substitution=RFFC5072*
U5 U6 U7: library part TSLP-6-4_1.1x0.7mm_P0.4mm, "TSLP, 6-Pin, 1.1x0.7mm (https://www.infineon.com/cms/en/product/packages/PG-TSLP/PG-TSLP-6-4/)", Manufacturer="Shenzhen Fuman", Part Number=FM8625H, Datasheet=https://www.lcsc.com/datasheet/lcsc_datasheet_2109141830_Shenzhen-Fuman-Elec-FM8625H_C2857391.pdf, Description="SPDT RF SWITCH"
U9 U12 U14: library part MXD8638C, Manufacturer=Maxscend, Datasheet=https://www.lcsc.com/datasheet/C285557.pdf, Description="Wideband RF SP3T Switch", Part Number=MXD8638C
U10 U11 U13 U36: library part SOT-353_SC-70-5, "SOT-353, SC-70-5", Manufacturer=UMW, Part Number=SN74LVC1G86DCKR, Datasheet=https://www.umw-ic.com/static/pdf/7c3c8f547545258487a86f9b9a30ed55.pdf, Description="IC GATE XOR 1CH 2-INP SC70-5", Substitution="TI SN74LVC1G86DCKR", ki_fp_filters="SOT* SG-*"
U15: library part Diodes_UDFN-10_1.0x2.5mm_P0.5mm, "U-DFN2510-10 package used by Diodes Incorporated (https://www.diodes.com/assets/Package-Files/U-DFN2510-10-Type-CJ.pdf)", Manufacturer="TECH PUBLIC", Part Number=TPAZ1143-04F, Datasheet=https://www.techpublic.com/storage/pdf/20230509/guMCHlfdvJyXLYRZ.pdf, Description="4-Channel Low Capacitance TVS Diode Array, DFN-10", ki_fp_filters=Diodes*UDFN*1.0x2.5mm*P0.5mm*
U16: library part QFN-48-1EP_7x7mm_P0.5mm_EP5.6x5.6mm_ThermalVias, "QFN, 48 Pin (http://www.st.com/resource/en/datasheet/stm32f042k6.pdf#page=94), generated with kicad-footprint-generator ipc_noLead_generator.py", Manufacturer=Lattice, Part Number=ICE40UP5K-SG48ITR, Datasheet=http://www.latticesemi.com/Products/FPGAandCPLD/iCE40Ultra, Description="iCE40 UltraPlus FPGA, 5280 LUTs, 1.2V, 48-pin QFN", ki_fp_filters=QFN*1EP*7x7mm*P0.5mm*
U17: library part QFN-48-1EP_7x7mm_P0.5mm_EP5.6x5.6mm_ThermalVias, "QFN, 48 Pin (http://www.st.com/resource/en/datasheet/stm32f042k6.pdf#page=94), generated with kicad-footprint-generator ipc_noLead_generator.py", Manufacturer=Maxim, Part Number=MAX2831ETM+T, Datasheet=https://www.analog.com/media/en/technical-documentation/data-sheets/MAX2831-MAX2832.pdf, Description="IC RF TXRX WIFI 48TQFN", Substitution=MAX2831ETM+
U18: library part QFN-48-1EP_7x7mm_P0.5mm_EP5.3x5.3mm_ThermalVias, "QFN, 48 Pin (https://www.trinamic.com/fileadmin/assets/Products/ICs_Documents/TMC2041_datasheet.pdf#page=62), generated with kicad-footprint-generator ipc_noLead_generator.py", Manufacturer=Maxim, Part Number=MAX5865ETM+T, Datasheet=https://www.analog.com/media/en/technical-documentation/data-sheets/MAX5865.pdf, Description="IC ANLG FRONT END 40MSPS 48-TQFN", Substitution=MAX5865ETM+
U19: library part QFN-20-1EP_4x4mm_P0.5mm_EP2.7x2.7mm_ThermalVias, "QFN, 20 Pin (https://www.silabs.com/documents/public/data-sheets/Si5351-B.pdf), generated with kicad-footprint-generator ipc_noLead_generator.py", Manufacturer="Silicon Laboratories Inc", Part Number=SI5351C-B-GM, Datasheet=https://www.silabs.com/documents/public/data-sheets/Si5351-B.pdf, Description="IC CLK GENERATOR 160MHZ 20QFN", Substitution=SI5351C-B-GM*, ki_fp_filters=QFN*1EP*4x4mm*P0.5mm*
U20: library part SOIC-8_5.3x5.3mm_P1.27mm, "SOIC, 8 Pin (JEITA/EIAJ ED-7311-19 variation 08-001-BBA and Atmel/Microchip, 208 mils width, https://www.jeita.or.jp/japanese/standard/book/ED-7311-19/#target/page_no=21, https://ww1.microchip.com/downloads/en/DeviceDoc/20005045C.pdf#page=23, https://ww1.microchip.com/downloads/en/DeviceDoc/doc2535.pdf#page=162), generated with kicad-footprint-generator ipc_gullwing_generator.py", Manufacturer=Winbond, Part Number=W25Q32JVSSIQ, Datasheet=http://www.winbond.com/resource-files/w25q32jv%20revg%2003272018%20plus.pdf, Description="IC FLASH 32MBIT SPI/QUAD 8SOIC", ki_fp_filters=*SOIC*5.3x5.3mm*P1.27mm*
U21: library part Texas_S-PVSON-N10_ThermalVias, "3x3mm Body, 0.5mm Pitch, S-PVSON-N10, DRC, http://www.ti.com/lit/ds/symlink/tps61201.pdf", Manufacturer="Texas Instruments", Part Number=TPS62410DRCR, Datasheet=https://www.ti.com/lit/ds/symlink/tps62410.pdf, Description="IC BUCK SYNC DUAL ADJ 0.8A 10SON", ki_fp_filters=WSON*EP*2x3mm*P0.5mm*
U22 U32: library part SOT-23-3, "SOT, 3 Pin (JEDEC MO-178 inferred 3-pin variant https://www.jedec.org/document_search?search_api_views_fulltext=MO-178), generated with kicad-footprint-generator ipc_gullwing_generator.py", Manufacturer=UMW, Part Number=XC6206P252MR, Datasheet=https://www.umw-ic.com/static/pdf/cdfcf1c7525e060894dd62e1f4220175.pdf, Description="Linear Voltage Regulator IC Positive Fixed 1 Output 100mA SOT-23", ki_fp_filters=SOT?23?3*
U23: library part TFBGA-180_12x12mm_Layout14x14_P0.8mm, "thin fine-pitch ball grid array package, 180 balls, https://www.nxp.com/docs/en/package-information/SOT570-3.pdf", Manufacturer=NXP, Part Number=LPC4330FET180, Datasheet=https://www.nxp.com/docs/en/data-sheet/LPC4350_30_20_10.pdf, Description="ARM Cortex-M4/M0 flashless MCU", Substitution=LPC4350FET180
U24 U28: library part TSOP-6_1.65x3.05mm_P0.95mm, "TSOP-6 package (comparable to TSOT-23), https://www.vishay.com/docs/71200/71200.pdf", Manufacturer="Diodes Inc.", Part Number=AP22652W6-7, Datasheet=https://www.diodes.com/assets/Datasheets/AP22652_53_52A_53A.pdf, Description="LOAD SWITCH,SOT26,T&R,3K", ki_fp_filters=TSOP*6*1.65x3.05mm*P0.95mm*
U25: library part WSON-8-1EP_2x2mm_P0.5mm_EP0.9x1.6mm, "8-Lead Plastic WSON, 2x2mm Body, 0.5mm Pitch, WSON-8, http://www.ti.com/lit/ds/symlink/lm27761.pdf", Manufacturer="Texas Instruments", Part Number=TRF37C73IDSGR, Datasheet=http://www.ti.com/lit/ds/symlink/trf37c73.pdf, Description="IC RF AMP 1MHZ-6GHZ 8WSON", Substitution=TRF37C73*, ki_fp_filters=WSON*1EP*2x2mm*P0.5mm*
U26: library part DHVQFN-14-1EP_2.5x3mm_P0.5mm_EP1x1.5mm, "DHVQFN, 14 Pin (JEDEC MO-241/VAA, https://assets.nexperia.com/documents/package-information/SOT762-1.pdf), generated with kicad-footprint-generator ipc_noLead_generator.py", Manufacturer=Nexperia, Part Number=74HC00BQ,115, Datasheet=https://assets.nexperia.com/documents/data-sheet/74HC_HCT00.pdf, Description="IC GATE NAND 4CH 2-INP 14DHVQFN", ki_fp_filters="DIP*W7.62mm* SO14*"
U27: library part SOT-353_SC-70-5, "SOT-353, SC-70-5", Manufacturer=UMW, Part Number=SN74LVC1G32DCKR, Datasheet=https://www.umw-ic.com/static/pdf/f1fd48d5f9832d4f28de5af0ef559744.pdf, Description="IC GATE OR 1CH 2-INP SC70-5", Substitution="TI SN74LVC1G32DCKR", ki_fp_filters="SOT* SG-*"
U30 U31 U37: library part SOT-363_SC-70-6, "SOT-363, SC-70-6, SC-88", Manufacturer=UMW, Part Number=ET3157, Datasheet=https://www.umw-ic.com/static/pdf/e11b4d52139c78daef28a97b5917cae5.pdf, Description="IC SW SPDT-NO/NCX1 7OHM SC70-6", Substitution="SN74LVC1G3157DCKR, TI SN74LVC1G3157DCKR", ki_fp_filters=*SC?70*
U33: library part DHVQFN-16-1EP_2.5x3.5mm_P0.5mm_EP1x2mm, "DHVQFN, 16 Pin (JEDEC MO-241/VAB, https://assets.nexperia.com/documents/package-information/SOT763-1.pdf), generated with kicad-footprint-generator ipc_noLead_generator.py", Manufacturer=Nexperia, Part Number=74HC4051BQ,115, Datasheet=https://assets.nexperia.com/documents/data-sheet/74HC_HCT4051.pdf, Description="IC MUX 8:1 120OHM 16DHVQFN", ki_fp_filters="DIP*W7.62mm* SOIC*3.9x9.9mm*P1.27mm* SOIC*5.3x10.2mm*P1.27mm* TSSOP*4.4x5mm*P0.65mm*"
U38 U40: library part TSLP-7-1, "https://www.infineon.com/cms/en/product/packages/PG-TSLP/PG-TSLP-7-1/", Manufacturer=Infineon, Part Number=BGB741L7ESDE6327XTSA1, Datasheet=https://www.infineon.com/dgdl/Infineon-BGB741L7ESD-DataSheet-v03_01-EN.pdf?fileId=5546d46265f064ff016638972c994ed7, Description="IC AMP CELL 50MHZ-3.5GHZ TSLP7-1", ki_fp_filters=WSON*1EP*2x2mm*P0.5mm*
U39: library part SOT-353_SC-70-5, "SOT-353, SC-70-5", Manufacturer=UMW, Part Number=SN74LVC1G08DCKR, Datasheet=https://www.umw-ic.com/static/pdf/a9de4748467d05723a3158203f0b9cbb.pdf, Description="IC GATE AND 1CH 2-INP SC70-5", Substitution="TI SN74LVC1G08DCKR", ki_fp_filters="SOT?23* Texas?R-PDSO-G5?DCK* Texas?R-PDSO-N5?DRL* Texas?X2SON*0.8x0.8mm*P0.48mm*"
X1: library part Oscillator_SMD_SeikoEpson_TG2520SMN-xxx-xxxxxx-4Pin_2.5x2.0mm, "Miniature Crystal Clock Oscillator TG2520 series, https://support.epson.biz/td/api/doc_check.php?dl=app_TG2520SMN&lang=en", Manufacturer=HCI, Part Number=8122S-25.000NQ33FTL, Datasheet=~, Description="25 MHz TCXO", ki_fp_filters=Oscillator*SMD*SeikoEpson*TG2520*2.5x2.0mm*
X2: library part Crystal_SMD_3225-4Pin_3.2x2.5mm, "SMD3225/4, Crystal, 3.2x2.5mm package, SMD, generated with kicad-footprint-generator make_crystal.py, http://www.txccrystal.com/images/pdf/7m-accuracy.pdf", Manufacturer="Shenzhen SCTF Electronics", Part Number=SX3B12.000F1210F30, Datasheet=~, Description="CRYSTAL 12.000 MHZ 12PF SMD"
X3: library part Crystal_SMD_3215-2Pin_3.2x1.5mm, "SMD Crystal FC-135 https://support.epson.biz/td/api/doc_check.php?dl=brief_FC-135R_en.pdf", Manufacturer=YXC, Part Number=XKXGI-SUA-32.768K, Datasheet=https://www.lcsc.com/datasheet/lcsc_datasheet_2210261730_YXC-Crystal-Oscillators-XKXGI-SUA-32-768K_C5213671.pdf, Description="CRYSTAL 32.768KHZ 12.5PF SMD", ki_fp_filters=Crystal*

## Via types
v1: diameter 0.45, hole 0.3, F.Cu to B.Cu, tented both sides, 751 vias
v2: diameter 0.4, hole 0.3, F.Cu to B.Cu, tented both sides, 119 vias
v3: diameter 0.7, hole 0.4, F.Cu to B.Cu, tented both sides, 83 vias

## Nets (pads, with @x,y where several pads share a name; then routed paths per layer and width w, separated by ;. In a path a pad name is that pad's centre, name@x,y a point inside that pad or via, vN(x,y) a via of type N, cw(c..) or ccw(c..) an arc to the next point about the centre after c; other vN are vias at no path point)
1V2_EN: R54.2 U21.9 U23.J1 | length 57.5
  F.Cu w0.127: U23.J1@150.8,51.02 150.8,51.42 149.95,52.27 149.95,61.17 153.14,64.36 153.14,69.2 154.03,70.09 154.03,70.688 156.142,72.8 157.6,72.8 158.51,73.71 158.51,82.13 159.68,83.3 159.68,91.9 160.2,92.42 165.3,92.42 165.98,91.74 R54.2@165.98,89.02 165.9,88.94 165.9,87.92 166,87.82 U21.9@166,87.195
1V2FPGA: C117.1 C178.1 C179.1 C184.1 C196.1 C205.1 FB6.2 FB7.2 TP22.1 U16.5 U16.30 | length 11.7
  F.Cu w0.25: U16.5@134.65,58.983 134.65,57.97 C179.1@134.71,57.91 ; C178.1@135.49,66.93 135.65,66.77 U16.30@135.65,65.857
  F.Cu w0.35: v1(134.21,57.88) 134.23,57.86 134.66,57.86 C179.1@134.71,57.91 ; v1(134.99,66.96) 135.01,66.98 135.44,66.98 C178.1@135.49,66.93
  F.Cu w0.364: C196.1@138.98,67.07 139,67.05 v1(139,66.57) ; C205.1@139.23,57.92 139.25,57.94 v1(139.25,58.42)
  F.Cu w0.45: C117.1@134.2,70.87 134.55,70.87 v1(135.2,70.22) 135.962,70.22 FB6.2@136,70.257 ; v1(147.4,69.52) 148.05,70.17 C184.1@148.05,70.52 ; v1(147.4,71.52) 148.05,70.87 C184.1@148.05,70.52 ; FB7.2@149.6,69.732 148.838,69.732 C184.1@148.05,70.52
  B.Cu w0.45: v1(147.4,71.52) TP22.1@148.3,71.52
2V5FPGA: C177.1 FB8.2 U16.24 | length 2.3
  F.Cu w0.25: U16.24@138.837,65.17 139.21,65.17 139.28,65.1 C177.1@139.9,65.1
  F.Cu w0.35: C177.1@139.9,65.1 139.92,65.12 140.712,65.12 FB8.2@141.013,65.42
2V5RF: C7.1 C8.1 C10.1 C17.1 C21.1 C23.1 C24.1 C26.1 C27.1 C30.1 C31.1 C60.1 C66.1 C95.1 Q1.4 TP3.1 U1.1 U2.1 U5.4 U6.4 U7.4 U9.7 U10.5 U11.5 U12.7 U14.7 U26.1 U26.4 U26.14 U27.5 U32.2 | length 22.5
  F.Cu w0.127: v1(111.25,28.32) U26.4@112.012,28.32 ; U26.1@112.95,29.757 112.95,30.31 113.07,30.43 113.45,30.43
  F.Cu w0.25: U14.7@76.45,34.52 77,33.97 C66.1@77.13,33.97 ; C60.1@81.57,35.87 81.7,35.87 U12.7@82.25,35.32 ; U9.7@87.4,34.52 87.95,33.97 C31.1@88.08,33.97 ; U1.1@88.5,43.12 89.38,43.12 C10.1@89.48,43.02 ; U6.4@88.7,46.72 89.2,46.72 v1(89.45,46.97) ; C8.1@89.43,46.47 C8.1@89.45,46.45 ; C17.1@93.72,44.77 U7.4@94.4,44.77 ; U5.4@94.65,53.02 C7.1@94.65,53.7 ; C21.1@94.8,31.34 U2.1@94.8,32.32 ; U26.14@113.45,29.757 113.45,30.43 113.45,30.69 C24.1@113.53,30.77
  F.Cu w0.364: v1(75.45,29.92) 75.45,30.4 C95.1@75.47,30.42 Q1.4@75.47,31.16 ; C66.1@77.13,33.97 77.15,33.95 v2(77.15,33.47) ; v2(81.55,36.37) 81.55,35.89 C60.1@81.57,35.87 ; C26.1@85.3,27.4 85.32,27.42 v1(85.8,27.42) 85.85,27.37 U11.5@86.35,27.37 ; C31.1@88.08,33.97 88.1,33.95 v2(88.1,33.47) ; C30.1@89.3,27.4 89.32,27.42 v1(89.8,27.42) 89.85,27.37 U27.5@90.35,27.37 ; C8.1@89.43,46.47 89.45,46.49 v1(89.45,46.97) ; C10.1@89.48,43.02 89.5,43 v1(89.5,42.52) ; v1(93.2,44.67) 93.68,44.67 C17.1@93.7,44.69 ; C27.1@93.3,27.4 93.32,27.42 v1(93.8,27.42) 93.85,27.37 U10.5@94.35,27.37 ; v1(94.15,53.72) 94.63,53.72 C7.1@94.65,53.7 ; v1(94.3,31.32) 94.78,31.32 C21.1@94.8,31.34 ; C24.1@113.53,30.77 113.55,30.79 v1(113.55,31.27)
  F.Cu w0.45: U32.2@72.438,47.07 72.65,47.07 v1(73.3,46.42) 73.48,46.6 C23.1@73.9,46.6 74.32,46.6 v1(74.5,46.42)
  B.Cu w0.45: v1(74.5,46.42) TP3.1@75.6,46.42
3V3AUX: C32.1 P20.3 P22.11 P28.1 TP17.1 U28.6 | length 2.8
  F.Cu w0.364: U28.6@161.52,26.82 161.82,27.12 C32.1@162.62,27.12 162.8,26.94 v1(162.8,26.52)
  B.Cu w0.45: TP17.1@161.9,26.52 v1(162.8,26.52)
3V3CLK: C113.1 C119.1 C120.1 C121.1 C122.1 C167.1 C168.2 C199.1 FB2.2 R104.1 R105.1 TP16.1 U19.10 U19.11 U19.14 U19.18 U19.20 U37.5 X1.4 | length 20.3
  F.Cu w0.127: v1(125.4,27.42) R104.1@125.4,28.11 ; v1(129.8,32.22) 129.81,32.21 R105.1@129.81,31.52
  F.Cu w0.25: v1(122.44,32.57) 122.79,32.22 U19.18@123.75,32.22 ; C113.1@122.6,30.6 123.22,31.22 U19.20@123.75,31.22 ; C122.1@125.08,35.32 125.2,35.2 U19.14@125.2,34.17 ; U19.11@126.7,34.17 126.7,35.1 C119.1@126.92,35.32 ; U19.10@127.65,33.22 128.68,33.22 C120.1@128.8,33.34
  F.Cu w0.35: C199.1@127.2,28.14 127.22,28.12 U37.5@128.35,28.12
  F.Cu w0.364: v1(122,30.41) 122.1,30.51 122.51,30.51 C113.1@122.6,30.6 ; v1(124.89,35.92) 124.99,35.82 124.99,35.41 C122.1@125.08,35.32 ; C119.1@126.92,35.32 127.01,35.41 127.01,35.82 v1(127.11,35.92) ; C120.1@128.89,33.43 129.3,33.43 v1(129.4,33.53)
  F.Cu w0.45: v1(121.29,29.72) 121.48,29.53 C168.2@121.48,29.12 121.48,27.89 X1.4@121.55,27.82 ; v1(122.44,32.57) 122.58,32.43 122.58,32.02 C121.1@122.63,31.97 ; v1(126.6,28.32) 126.75,28.17 127.17,28.17 C199.1@127.2,28.14 ; v1(127.7,40.42) 128.35,41.07 C167.1@128.7,41.07 ; FB2.2@129.487,42.62 129.488,41.858 C167.1@128.7,41.07 ; v1(129.7,40.42) 129.05,41.07 C167.1@128.7,41.07
  B.Cu w0.45: v1(129.7,40.42) TP16.1@130.6,40.42
3V3FPGA: C123.1 C140.1 C148.1 C149.1 C150.1 C166.1 C173.1 C174.1 C181.1 C182.1 C183.1 C185.1 C186.1 C187.1 C197.1 FB2.1 FB4.2 R44.2 R45.2 R76.2 TP2.1 U16.1 U16.22 U16.33 U18.18 U22.3 | length 77.3
  F.Cu w0.127: R76.2@63.62,65.72 65.82,63.52 99.9,63.52 101,64.62 C140.1@101.52,64.62 ; v1(135.41,55.61) 135.41,55.62 R45.2@135.9,56.11 ; v1(142.01,60.46) R44.2@142.01,61.12
  F.Cu w0.25: U18.18@110.85,55.07 111.83,55.07 C123.1@111.9,55.14 ; v1(132.36,58.42) 132.65,58.71 U16.1@132.65,58.983 ; C148.1@133.92,66.93 133.92,66.472 134.15,66.242 U16.33@134.15,65.857 ; U16.22@138.837,64.17 139.81,64.17 C149.1@139.91,64.27
  F.Cu w0.35: C123.1@111.9,55.14 112.37,55.14 v1(112.4,55.11) ; C174.1@130.1,60.84 130.15,60.79 130.58,60.79 v1(130.6,60.81) ; v1(132.36,58.42) 132.38,58.4 132.38,57.99 C150.1@132.43,57.94 ; v1(133.42,66.99) 133.43,66.98 133.87,66.98 C148.1@133.92,66.93 ; C149.1@139.91,64.27 139.96,64.22 139.96,63.79 v1(139.94,63.77) ; v1(140.6,59.81) 140.62,59.79 141.05,59.79 C183.1@141.1,59.84
  F.Cu w0.364: v1(111.6,60.32) 111.6,60.8 C187.1@111.62,60.82 ; v1(130,65.77) 130,66.25 C185.1@130.02,66.27
  F.Cu w0.45: C140.1@101.52,64.62 101.57,64.57 101.57,64.16 v1(101.71,64.02) ; v1(115.4,54.52) 116.05,55.17 C186.1@116.4,55.17 116.75,55.17 v1(117.4,54.52) ; v1(127.3,61.12) 127.95,60.47 C197.1@128.3,60.47 128.65,60.47 v1(129.3,61.12) ; v1(127.7,44.82) 128.35,44.17 C166.1@128.7,44.17 ; FB2.1@127.913,42.62 127.913,43.382 C166.1@128.7,44.17 ; v1(129.7,44.82) 129.05,44.17 C166.1@128.7,44.17 ; C173.1@139.5,71.3 141.543,71.3 U22.3@141.7,71.457 141.857,71.3 143.62,71.3 145.9,69.02 v1(145.9,68.72) 146.55,68.07 C181.1@146.55,67.72 ; v1(145.9,64.72) 146.55,65.37 C182.1@146.55,65.72 ; C182.1@146.55,65.72 146.55,66.07 v1(145.9,66.72) 146.55,67.37 C181.1@146.55,67.72 ; C182.1@146.55,65.72 147.837,67.007 FB4.2@148.2,67.007 147.488,67.72 C181.1@146.55,67.72
  B.Cu w0.45: TP2.1@145.2,65.72 145.9,66.42 v1(145.9,66.72)
3V3LED: C80.1 C81.1 C110.1 C124.1 C163.1 C170.1 FB5.2 Q3.2 R11.1 R49.1 R50.2 R72.2 R73.2 R74.2 R75.2 R125.2 SW1.2 TP15.1 | length 22.6
  F.Cu w0.127: R74.2@63.62,48.52 63.62,49.76 C124.1@63.78,49.92 ; R72.2@63.62,56.52 R125.2@63.62,57.72 63.62,58.86 C81.1@63.78,59.02 ; C110.1@63.78,54.52 63.78,53.15 R73.2@63.81,53.12 ; R50.2@63.81,79.12 R75.2@63.81,78.12 63.9,78.21 v1(65.8,78.21) ; v1(67.4,76.72) R49.1@67.4,77.41 ; R11.1@75.78,68.17 75.78,67.19 C163.1@76.1,66.87
  F.Cu w0.45: v1(63.59,50.52) 63.73,50.38 63.73,49.97 C124.1@63.78,49.92 ; v1(63.59,55.12) 63.73,54.98 63.73,54.57 C110.1@63.78,54.52 ; v1(63.59,59.62) 63.73,59.48 63.73,59.07 C81.1@63.78,59.02 ; v1(65.8,78.21) 65.94,78.35 66.35,78.35 C80.1@66.4,78.4 ; v1(75.1,66.22) 75.75,66.87 C163.1@76.1,66.87 76.45,66.87 v1(77.1,66.22) 77.73,66.22 78.05,66.54 Q3.2@78.05,66.757 ; v1(93.8,64.52) 94.45,65.17 C170.1@94.45,65.52 ; v1(93.8,66.52) 94.45,65.87 C170.1@94.45,65.52 ; FB5.2@96,64.732 95.238,64.732 C170.1@94.45,65.52
  B.Cu w0.45: v1(93.8,64.52) TP15.1@94.8,64.52
!VAA_ENABLE: R60.2 U23.G4 | length 96.5
  F.Cu w0.127: v1(77.55,68.17) R60.2@78.24,68.17 ; v2(152,49.02) U23.G4@152.4,48.62